# Altium PCB stm32pcb.PcbDoc
Units mm, origin at the board's own origin, x right, y up, seen from the top; angles counter-clockwise.
Board outline 35.25 x 39.25 mm, 4 copper layers (L1 (Signal), L2 (GND), L3 (GND), L4 (Signal)), stack 1.57 mm thick; 34 components, 26 nets, 172 pads, 56 vias.
Unrouted connection lines stored in the file: 1.
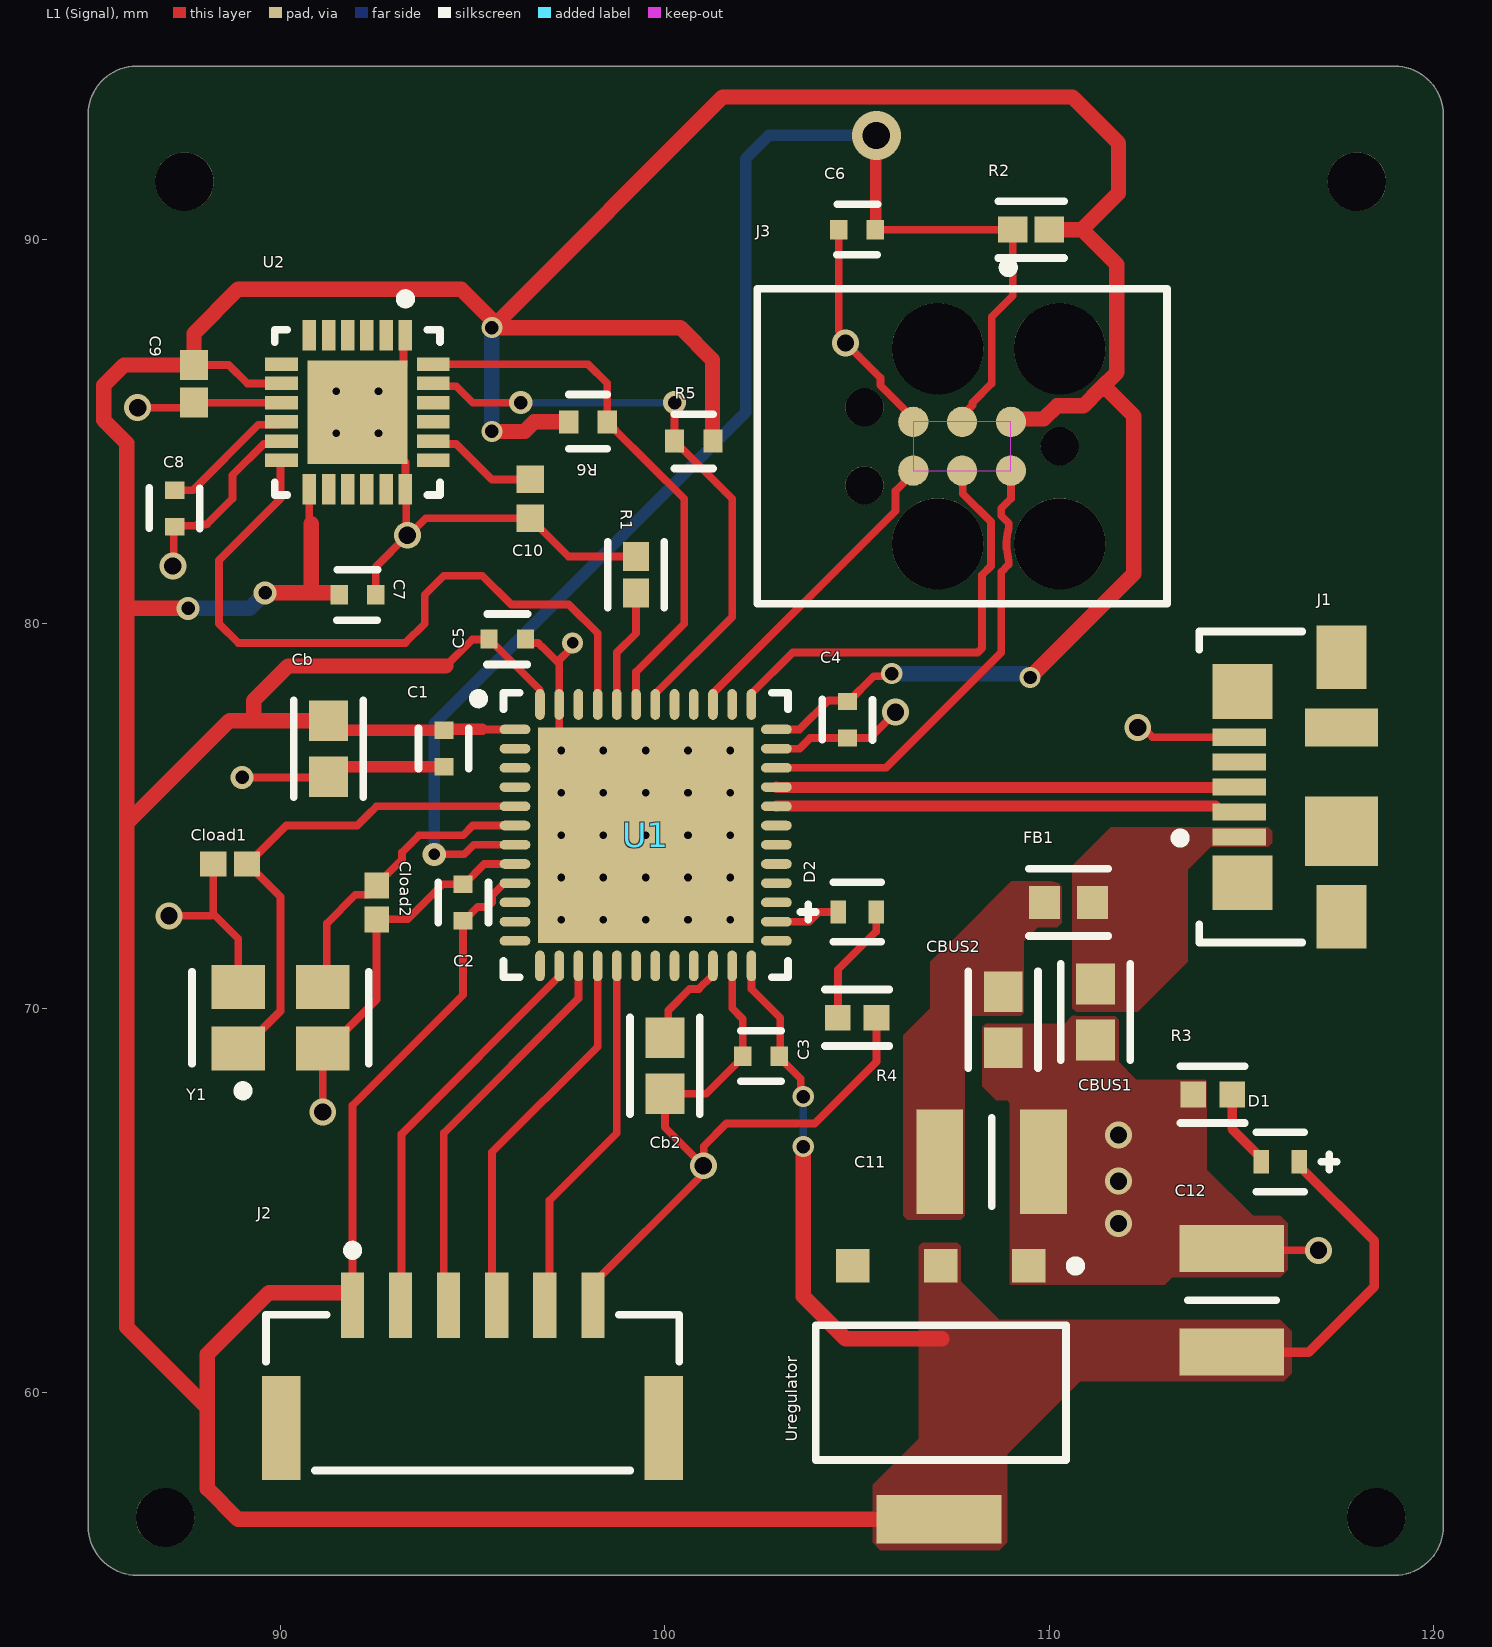
[diagram p0: L1 (Signal) view]
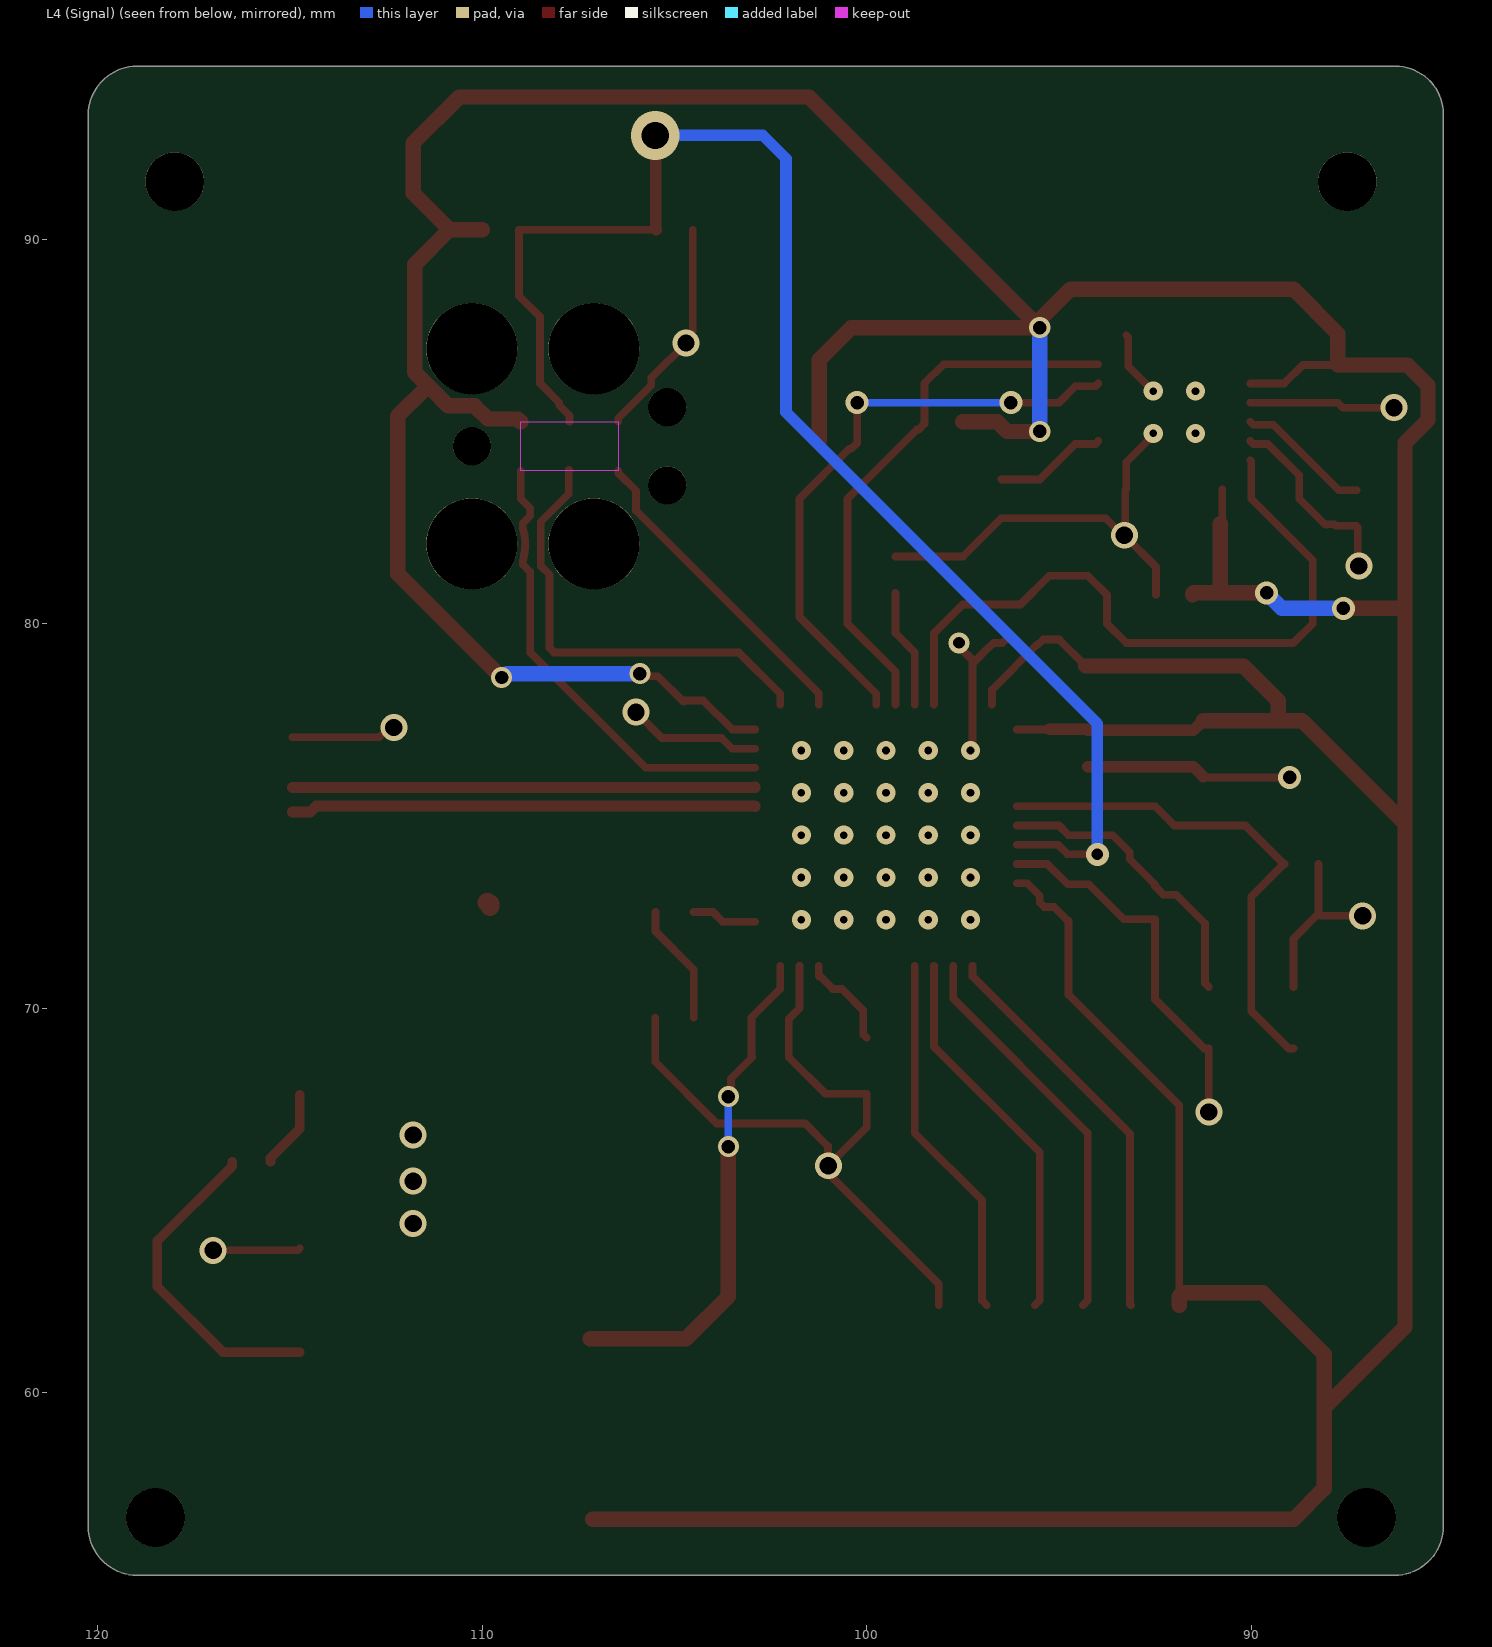
[diagram p1: L4 (Signal) view, seen from below]
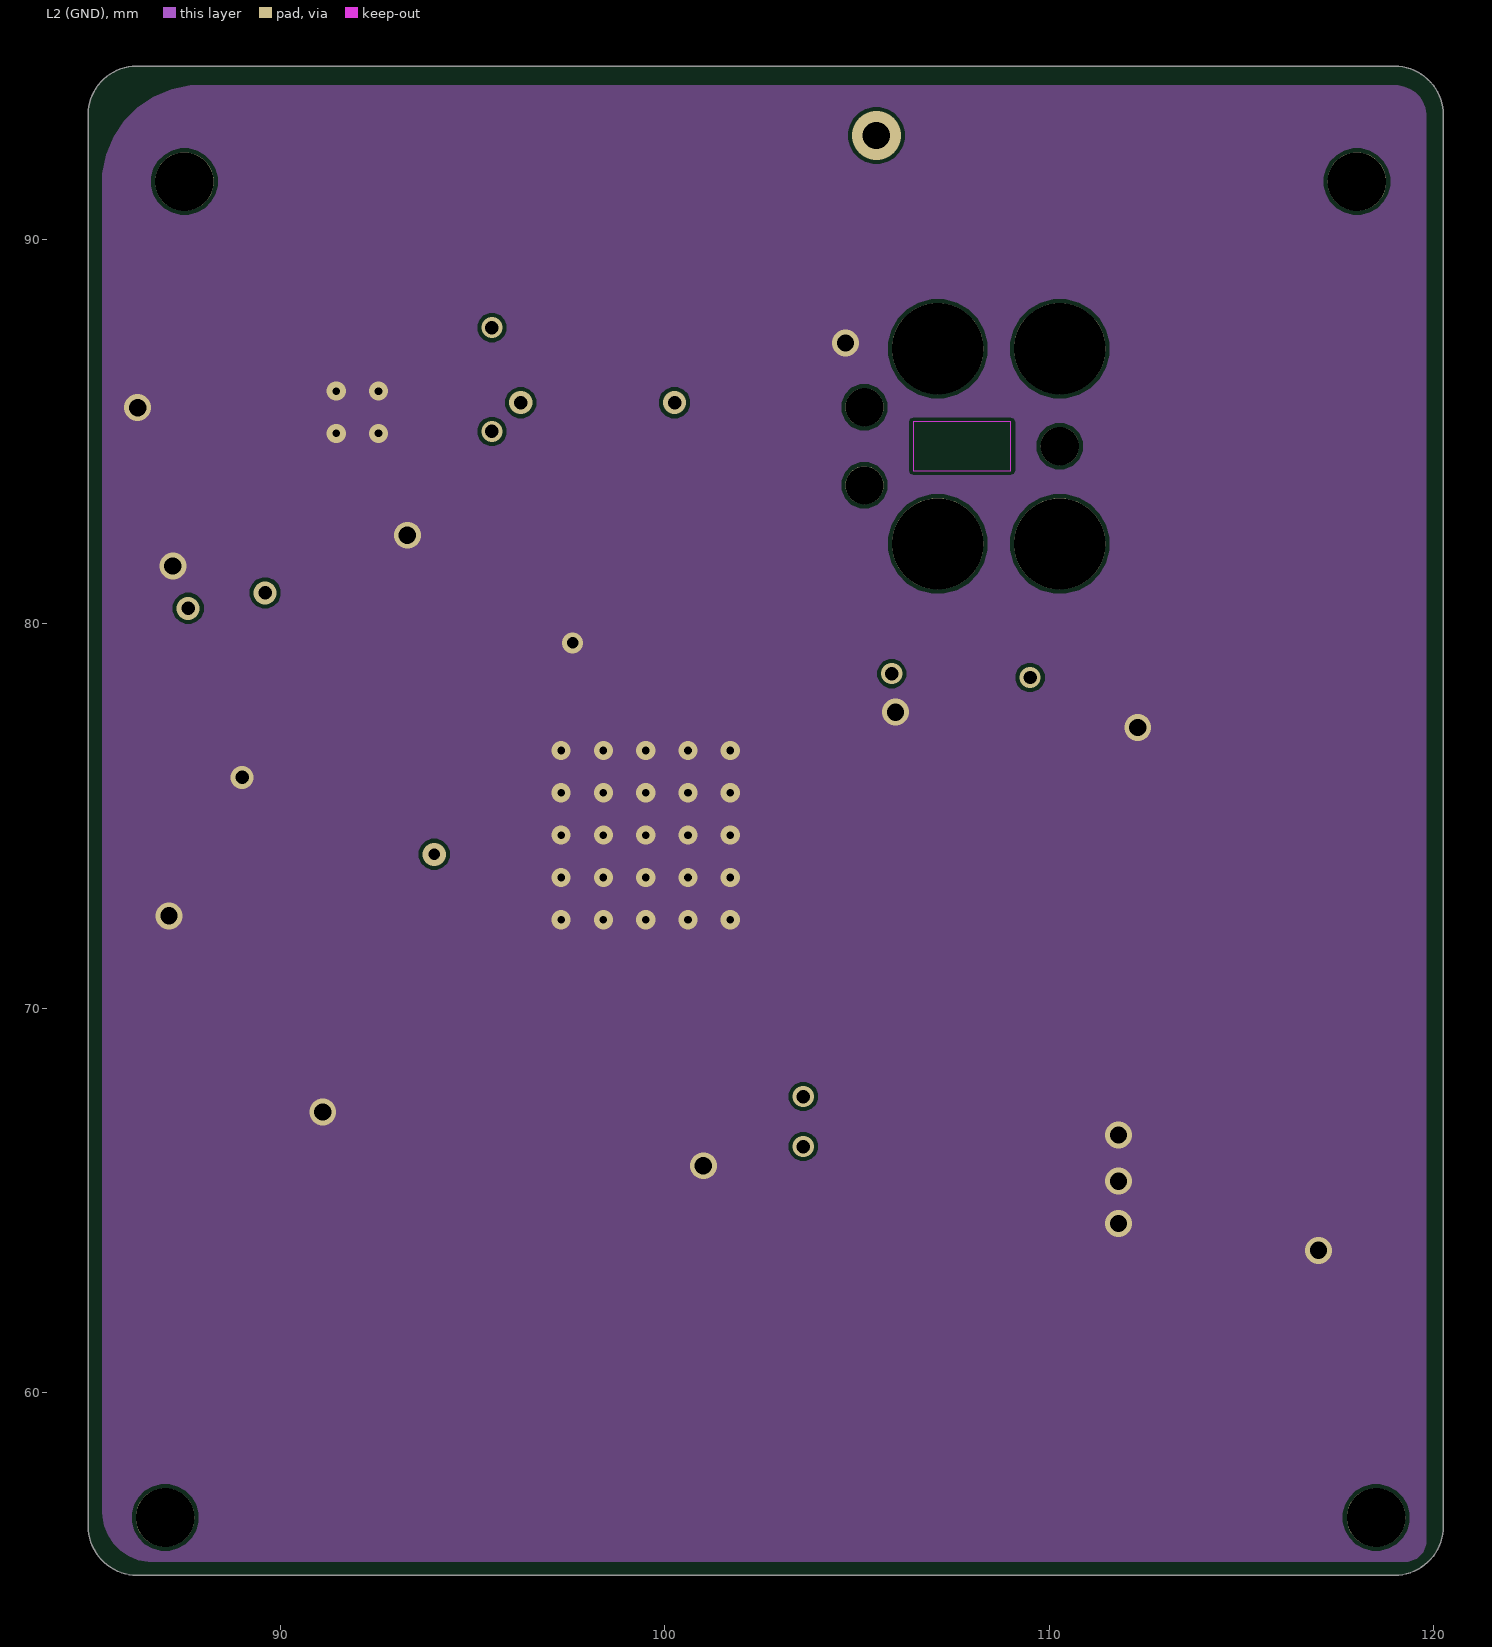
[diagram p2: L2 (GND)]
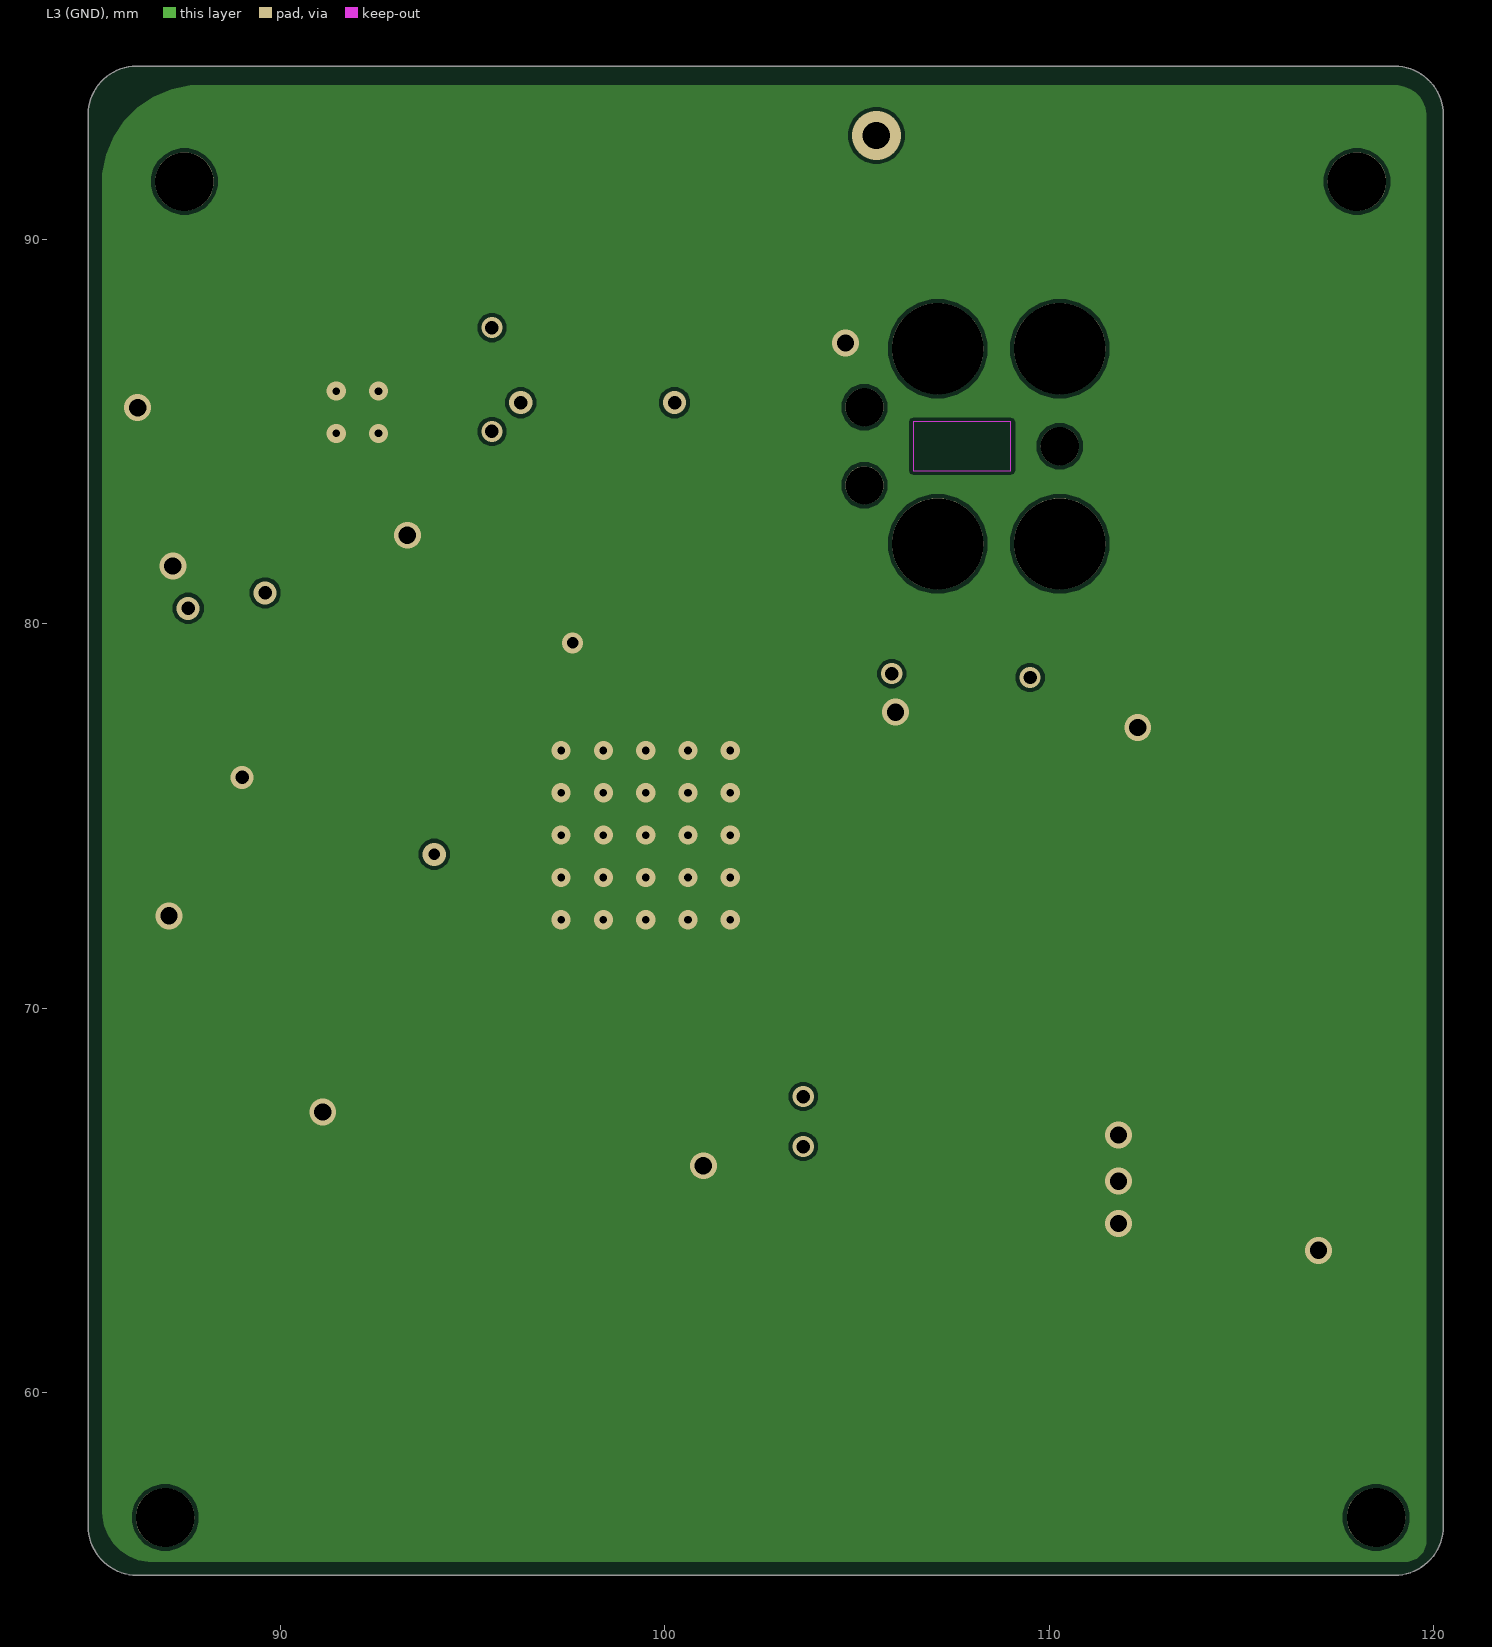
[diagram p3: L3 (GND)]
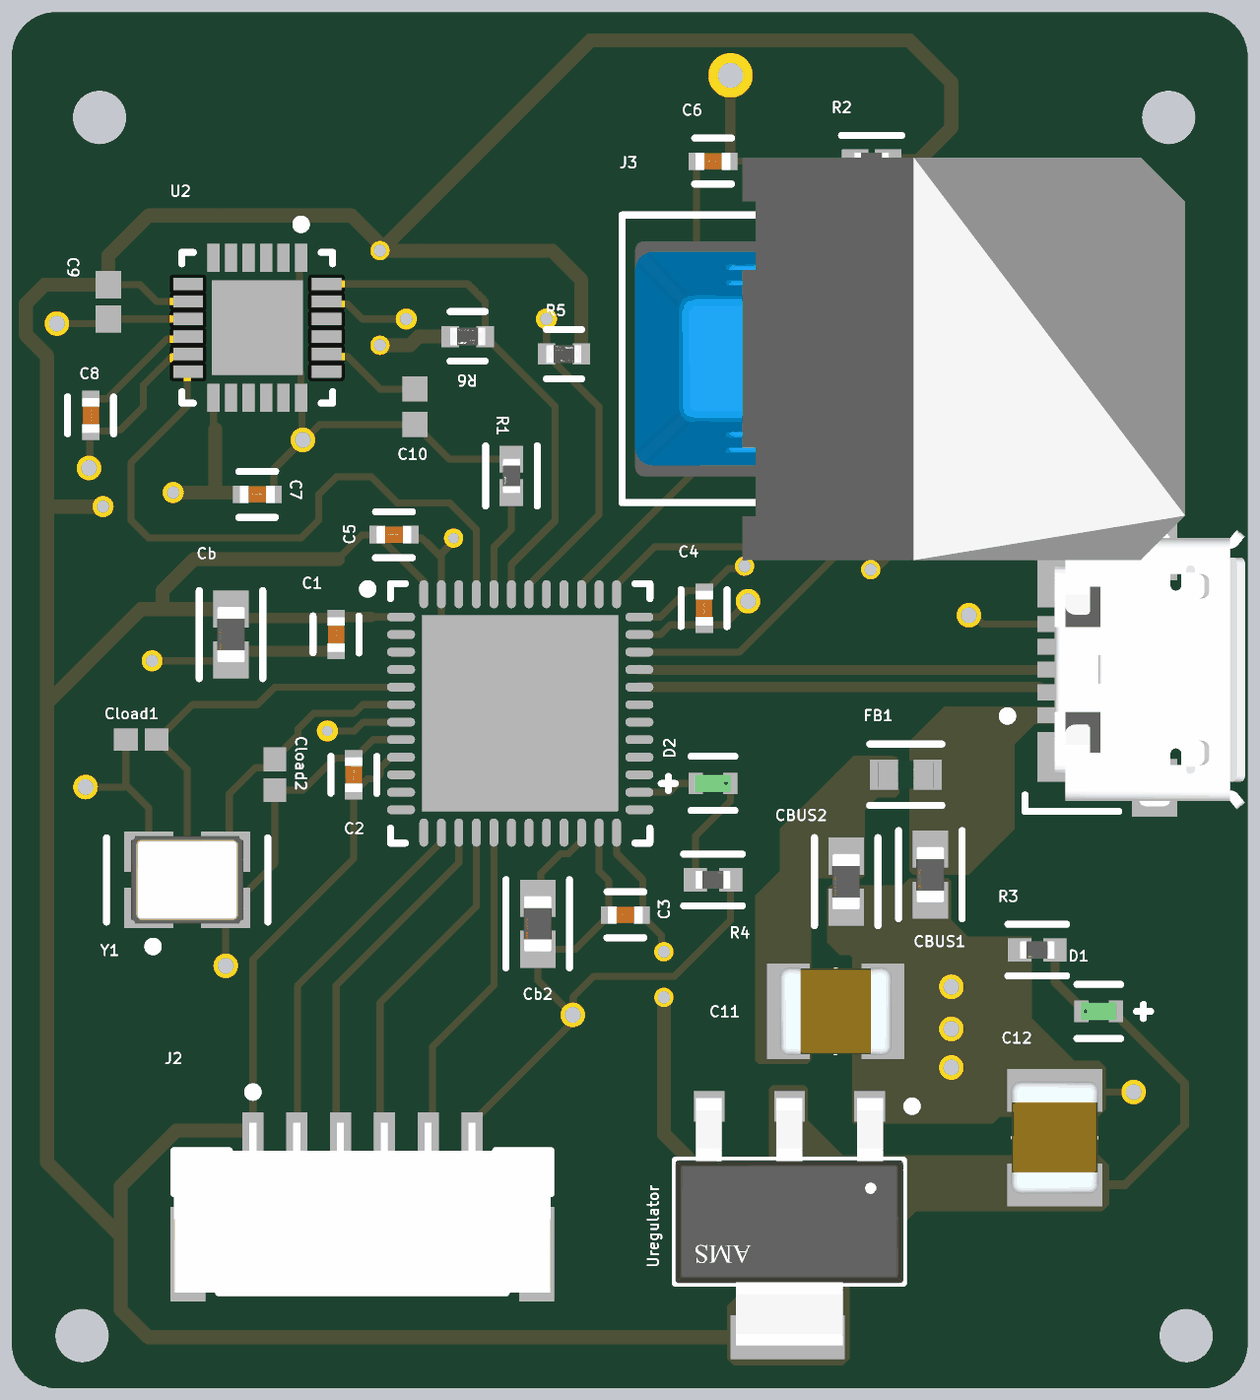
[diagram p4: 3D render of the assembled board from above, using the file's embedded part models]

## Layer stack, top to bottom
Top Solder: solder mask 0.0254, SM-001, Dk 4
L1 (Signal): signal copper 0.035
Dielectric 1: prepreg 0.2, PP-017, Dk 4.6
L2 (GND): signal copper 0.0175
Dielectric 3: core 1.065, Core-039, Dk 4.6
L3 (GND): signal copper 0.0175
Dielectric 5: prepreg 0.2, PP-017, Dk 4.6
L4 (Signal): signal copper 0.035
Bottom Solder: solder mask 0.0254, SM-001, Dk 4

## Board outline
85,56.52 85,93.25 cw(c86.25,93.25) 86.25,94.5 118.98,94.5 cw(c118.98,93.23) 120.25,93.23 120.25,56.52 cw(c118.98,56.52) 118.98,55.25 86.27,55.25 cw(c86.27,56.52)

## Design rules (kind name [scope] priority, off if disabled: settings)
Clearance [All] p1: gap=0.1 ignorepadtopadclearanceinfootprint=FALSE
DiffPairsRouting [All] p1: maxlimit=0.254 minlimit=0.203 mostfreqgap=0.254 toplayer_maxgap=0.203 toplayer_prefgap=0.203 toplayer_minwidth=0.285 toplayer_maxwidth=0.285 toplayer_prefwidth=0.285 bottomlayer_maxgap=0.203 bottomlayer_prefgap=0.203 bottomlayer_minwidth=0.285 bottomlayer_maxwidth=0.285 bottomlayer_prefwidth=0.285 impedanceprofiledriven=TRUE impedanceprofileid={B89FA8B1-6A6C-4102-8C82-A7481BB1D34D} impedanceprofilevalue=90.000000 maxuncoupledlength=12.7
PolygonConnect [All] p1: connectstyle=Direct reliefconductorwidth=0.254 reliefentries=4 polygonreliefangle="90 Angle" airgapwidth=0.254
RoutingVias [All] p1: holewidth=0.3 width=0.7 viastyle="Through Hole" minholewidth=0.25 minwidth=0.55 maxholewidth=0.4 maxwidth=0.7
SolderMaskExpansion [All] p1: expansion=0 istentingtop=FALSE
SupplyNets "Schematic Supply Nets_4" [InNet('GND')] p1: voltage=0.000
SupplyNets "Schematic Supply Nets_3" [InNet('+5')] p2: voltage=0.000
SupplyNets "Schematic Supply Nets_1" [InNet('+3V3')] p3: voltage=0.000
SupplyNets "Schematic Supply Nets" [InNet('VBUS')] p4: voltage=0.000
UnRoutedNet [All] p1: checkbadconnections=TRUE
Width [All] p1: maxlimit=1 minlimit=0.2 preferedwidth=0.3 midlayer1_maxwidth=0.254 midlayer1_prefwidth=0.254 midlayer2_maxwidth=0.254 midlayer2_prefwidth=0.254 minimp=50.000000 maximp=50.000000 favimp=50.000000
28 further rules are at their usual default settings.

## Classes and differential pairs
differential pair class DIFF_USB: USB_D
differential pair USB_D: +USB_D_P -USB_D_N

## Components (designator, comment, footprint, x,y, rotation, side; value= is the part's Value field where it differs from the comment)
C1 "100n" FP-0402-L_1_0_0_05-W_0_5-MFG 94.25,76.75 r270 top
C2 "100n" FP-0402-L_1_0_0_05-W_0_5-MFG 94.75,72.75 r90 top
C3 "100n" FP-0402-L_1_0_0_05-W_0_5-MFG 102.5,68.75 r180 top
C4 "100n" FP-0402-L_1_0_0_05-W_0_5-MFG 104.75,77.5 r270 top
C5 "100n" FP-0402-L_1_0_0_05-W_0_5-MFG 95.9,79.6 r0 top
C6 "100n" FP-0402-L_1_0_0_05-W_0_5-MFG 105,90.25 r180 top
C7 "100n" FP-0402-L_1_0_0_05-W_0_5-MFG 92,80.75 r0 top
C8 "100n" FP-0402-L_1_0_0_05-W_0_5-MFG 87.25,83 r270 top
C9 "10n" CAPC1005X56X25ML10T15 87.75,86.24 r90 top
C10 "2n2" CAPC1005X55X25ML05T05 96.5,83.25 r90 top
C11 "22u" CAPC3225X270N 108.5,66 r180 top
C12 "22u" CAPC3225X270N 114.75,62.4 r270 top
Cb "2.2u" FP-0603-L_1_6_0_2-W_0_8_0-IPC_B 91.25,76.75 r270 top
Cb2 "2u2" FP-0603-L_1_6_0_2-W_0_8_0-IPC_B 100,68.5 r270 top
CBUS1 "2.2u" FP-0603-L_1_6_0_2-W_0_8_0-IPC_B 111.2,69.9 r270 top
CBUS2 "2.2u" FP-0603-L_1_6_0_2-W_0_8_0-IPC_B 108.8,69.7 r270 top
Cload1 "10pF" CAPC1005X56X25NL10T15 88.69,73.75 r0 top
Cload2 "10pF" CAPC1005X56X25NL10T15 92.5,72.75 r90 top
D1 "Green" FP-SM0402GC-MFG 116.005,66 r180 top
D2 "Green" FP-SM0402GC-MFG 105,72.5 r0 top
FB1 "MPZ1608S101ATAH0" FP-MPZ1608-0_6-IPC_C 110.5,72.75 r180 top
J1 "473460001" FP-473460001-MFG 117.25,75.75 r90 top
J2 "SM06B-GHS-TB(LF)(SN)" FP-SM06B-GHS-TB_LF_SN-MFG 95,60 r0 top
J3 "DNP" Tag-Connect_0_0 107.73,84.615 r180 top
R1 "10k" FP-AT0402-IPC_A 99.25,81.274 r270 top
R2 "10k" FP-AT0402-IPC_A 109.524,90.25 r0 top
R3 "1k" FP-TFCR0402-IPC_A 114.25,67.75 r180 top
R4 "1k" FP-TFCR0402-IPC_A 105,69.75 r0 top
R5 "2.2k" FP-RT0402-MFG 100.75,84.75 r0 top value=2.2KΩ
R6 "2.2k" FP-RT0402-MFG 98,85.25 r180 top value=2.2KΩ
U1 "STM32F411CEU6" STM-UFQFPN48_L 99.5,74.5 r0 top
U2 "MPU-6050" IS-QFN-24_V 92,85.5 r270 top
Uregulator "AMS1117-3.3" FP-AMS1117-IPC_C 107.179,60 r270 top
Y1 "25MHz" FP-TSX-3225-MFG 90,69.75 r0 top

## Footprints (in the part's own frame and the unit in brackets; to place one, negate y for a bottom-side part, rotate by r counter-clockwise, add the part's x,y. Pads: shape width x height; smd on the part's side, far side on the other; paste and mask are expansions set on the pad)
CAPC1005X55X25ML05T05 [mm] "Chip Capacitor, 2-Leads, Body 1.00x0.50mm, IPC Low Density"
  rect 0.72x0.72 smd: 1(-0.51,0) 2(0.51,0)
  body extent -0.53,-0.28 0.53,0.27, height 0.55
CAPC1005X56X25ML10T15 [mm] "Chip Capacitor, 2-Leads, Body 1.00x0.50mm, IPC Low Density"
  rect 0.78x0.74 smd: 1(-0.49,0) 2(0.49,0)
  body extent -0.55,-0.3 0.55,0.3, height 0.56
CAPC1005X56X25NL10T15 [mm] "Chip Capacitor, 2-Leads, Body 1.00x0.50mm, IPC Medium Density"
  rect 0.68x0.64 smd: 1(-0.44,0) 2(0.44,0)
  body extent -0.55,-0.3 0.55,0.3, height 0.56
CAPC3225X270N [mm]
  rect 1.22x2.72 smd: 1(-1.35,0) 2(1.35,0)
  silkscreen extent 0,-1.15 0,1.15, body extent -1.6,-1.25 1.6,1.25, height 2.7
FP-0402-L_1_0_0_05-W_0_5-MFG [mm]
  rect 0.45x0.5 smd paste+0 mask+0: 1(-0.475,0) 2(0.475,0)
  silkscreen extent -0.53,-0.66 0.53,0.65, body extent -0.8,-0.38 0.8,0.38, height 0.25
FP-0603-L_1_6_0_2-W_0_8_0-IPC_B [mm]
  rect 1.058x1.012 smd paste+0 mask+0: 1(-0.727,0) 2(0.727,0)
  silkscreen extent -1.26,-0.91 1.26,0.91, body extent -1.51,-0.76 1.51,0.76, height 0.25
FP-473460001-MFG [mm]
  rect 0.45x1.38 smd paste+0 mask+0: 1(-1.3,2.31) 2(-0.65,2.31) 3(0,2.31) 4(0.65,2.31) 5(1.3,2.31)
  rect 1.425x1.55 smd paste+0 mask+0: 6(-2.488,2.225) 7(2.488,2.225)
  rect 1.65x1.3 smd paste+0 mask+0: 8(-3.375,-0.35) 11(3.375,-0.35)
  rect 1.8x1.9 smd paste+0 mask+0: 9(-1.15,-0.35)
  rect 1x1.9 smd paste+0 mask+0: 10(1.55,-0.35)
  silkscreen extent -4.05,0.67 4.05,3.97, body extent -4.3,-2.48 4.3,3.45, height 0.25
FP-AMS1117-IPC_C [mm]
  rect 0.872x0.872 smd paste+0 mask+0: 1(-3.295,2.29) 2(-3.295,0) 3(-3.295,-2.29)
  rect 1.25x3.25 smd paste+0 mask+0: 4(3.296,-0.049)
  silkscreen extent -3.42,-3.25 1.75,3.63, body extent -3.9,-3.35 3.9,3.35, height 0.25
FP-AT0402-IPC_A [mm]
  rect 0.76x0.672 smd paste+0 mask+0: 1(-0.476,0) 2(0.476,0)
  silkscreen extent -0.86,-0.74 0.86,0.74, body extent -1.06,-0.54 1.06,0.54, height 0.25
FP-MPZ1608-0_6-IPC_C [mm]
  rect 0.806x0.858 smd paste+0 mask+0: 1(-0.626,0) 2(0.626,0)
  silkscreen extent -1.03,-0.87 1.03,0.87, body extent -1.13,-0.58 1.13,0.58, height 0.25
FP-RT0402-MFG [mm]
  rect 0.5x0.6 smd paste+0 mask+0: 1(-0.5,0) 2(0.5,0)
  silkscreen extent -0.5,-0.71 0.5,0.7, body extent -0.85,-0.4 0.85,0.4, height 0.25
FP-SM06B-GHS-TB_LF_SN-MFG [mm]
  rect 0.6x1.7 smd paste+0 mask+0: 1(-3.125,2.275) 2(-1.875,2.275) 3(-0.625,2.275) 4(0.625,2.275) 5(1.875,2.275) 6(3.125,2.275)
  rect 1x2.7 smd paste+0 mask+0: 7(-4.975,-0.925) 8(4.975,-0.925)
  silkscreen extent -5.38,-2.02 5.38,3.82, body extent -5.58,-2.37 5.58,3.22, height 0.25
FP-SM0402GC-MFG [mil]
  rect 16x24 smd paste+0 mask+0: 1(-19.5,0) 2(19.5,0)
  silkscreen extent -58,-30 25,31, body extent -31,-18 31,18, height 10
FP-TFCR0402-IPC_A [mm]
  rect 0.665x0.672 smd paste+0 mask+0: 1(-0.504,0) 2(0.504,0)
  silkscreen extent -0.84,-0.74 0.84,0.74, body extent -1.04,-0.54 1.04,0.54, height 0.25
FP-TSX-3225-MFG [mm]
  rect 1.4x1.15 smd paste+0 mask+0: 1(-1.1,-0.8) 2(1.1,-0.8) 3(1.1,0.8) 4(-1.1,0.8)
  silkscreen extent -2.3,-2.02 2.3,1.2, body extent -1.9,-1.48 1.9,1.48, height 0.25
IS-QFN-24_V [mm] "QFN, 24-Leads, Body 4x4mm, Pitch 0.5mm, Thermal Pad 2.7x2.6mm"
  rect 0.8x0.35 smd: 1(-2,1.25) 2(-2,0.75) 3(-2,0.25) 4(-2,-0.25) 5(-2,-0.75) 6(-2,-1.25) 13(2,-1.25) 14(2,-0.75) 15(2,-0.25) 16(2,0.25) 17(2,0.75) 18(2,1.25)
  rect 0.35x0.85 smd mask+0.102: 7(-1.25,-1.975) 8(-0.75,-1.975) 9(-0.25,-1.975) 10(0.25,-1.975) 11(0.75,-1.975) 12(1.25,-1.975) 19(1.25,1.975) 20(0.75,1.975) 21(0.25,1.975) 22(-0.25,1.975) 23(-0.75,1.975) 24(-1.25,1.975)
  rect 2.7x2.6 smd: 25(0,0)
  silkscreen extent -3.07,-2.15 2.15,2.15, body extent -2,-2 2,2, height 0.95
STM-UFQFPN48_L [mm] "QFN, 48-Leads, Body 7.1x7.1mm, Pitch 0.5mm, Thermal Pad 5.6x5.6mm, IPC High Density"
  oval 0.8x0.25 smd: 1(-3.4,2.75) 2(-3.4,2.25) 3(-3.4,1.75) 4(-3.4,1.25) 5(-3.4,0.75) 6(-3.4,0.25) 7(-3.4,-0.25) 8(-3.4,-0.75) 9(-3.4,-1.25) 10(-3.4,-1.75) 11(-3.4,-2.25) 12(-3.4,-2.75) 25(3.4,-2.75) 26(3.4,-2.25) 27(3.4,-1.75) 28(3.4,-1.25) 29(3.4,-0.75) 30(3.4,-0.25) 31(3.4,0.25) 32(3.4,0.75) 33(3.4,1.25) 34(3.4,1.75) 35(3.4,2.25) 36(3.4,2.75)
  oval 0.25x0.8 smd: 13(-2.75,-3.4) 14(-2.25,-3.4) 15(-1.75,-3.4) 16(-1.25,-3.4) 17(-0.75,-3.4) 18(-0.25,-3.4) 19(0.25,-3.4) 20(0.75,-3.4) 21(1.25,-3.4) 22(1.75,-3.4) 23(2.25,-3.4) 24(2.75,-3.4) 37(2.75,3.4) 38(2.25,3.4) 39(1.75,3.4) 40(1.25,3.4) 41(0.75,3.4) 42(0.25,3.4) 43(-0.25,3.4) 44(-0.75,3.4) 45(-1.25,3.4) 46(-1.75,3.4) 47(-2.25,3.4) 48(-2.75,3.4)
  rect 5.6x5.6 smd: 49(0,0)
  silkscreen extent -4.47,-3.7 3.7,3.7, body extent -3.55,-3.55 3.55,3.55, height 0.6
Tag-Connect_0_0 [mm]
  round 0.787 smd paste-1000 mask+0: 1(-1.27,-0.635) 2(-1.27,0.635) 3(0,-0.635) 4(0,0.635) 5(1.27,-0.635) 6(1.27,0.635)
  round 2.375 hole 2.375 unplated paste-2539.97 mask+0: ""(-2.54,2.54) ""(-2.54,-2.54) ""(0.635,2.54) ""(0.635,-2.54)
  round 0.991 hole 0.991 unplated paste-2539.97 mask+0: ""(-2.54,0) ""(2.54,-1.016) ""(2.54,1.016)
  Keep-Out Layer region: -1.27,-0.635 1.27,-0.635 1.27,0.635 -1.27,0.635
  silkscreen extent -5.33,-4.77 5.33,4.1, body extent -5.05,-3.91 5.05,3.91, height 0.25

## Part data
C1 C2 C3 C4 C5 C6 C7 C8: library part CMP-14477-001971-2, "None"
C9: library part CMP-2008-02553-1, Manufacturer="AVX Interconnect / Elco", Part Number=04023G103ZAT2A
C10: library part CMP-2008-01291-1, Manufacturer=Vitramon, Part Number=VJ0402Y222JXQPW1BC
C11 C12: library part CL32A226KOJNNNE, "Capacitor", Manufacturer_Name=SAMSUNG, Datasheet Link=https://ad.componentsearchengine.com/Datasheets/2/CL32A226KOJNNNE.pdf, Height=2.7mm, Manufacturer_Part_Number=CL32A226KOJNNNE
Cb Cb2 CBUS1 CBUS2: library part CMP-14477-003150-2, "None", Capacitance=2.2uF, Case/Package=0603, Max Operating Temperature=85°C, Min Operating Temperature=-55°C, Tolerance=20%, Voltage Rating=16V, Mount="Surface Mount", Packaging="Cut Tape", RoHS Compliant=Yes
Cload1 Cload2: library part CMP-2008-02993-1, Manufacturer="AVX Interconnect / Elco", Part Number=LD025A100JAB2A
D1 D2: library part CMP-35283-000001-2, "LED GREEN CLEAR 0402 SMD", Case Code (Imperial)=0402, Case Code (Metric)=1005, Forward Voltage=1.9V, Lens Color=Colorless, Test Current=20mA, Case/Package=0402, Color=Green, Dominant Wavelength=572nm, Height=0.71mm, Length=1mm, Lens Size=1mm, Lens Style=Flat, Lens Transparency=Clear, Luminous Intensity=28.5mcd, Mount="Surface Mount", Packaging="Tape and Reel", Viewing Angle=130°, Width=0.5mm
FB1: library part CMP-08257-000005-2, "FERRITE BEAD 100 OHM 0603 1LN", Case Code (Imperial)=0603, Case Code (Metric)=1608, Current Rating=3A, DC Resistance (DCR)=30mR, Package Quantity=4000, Tolerance=25%, Case/Package=0603, Core Material=Ferrite, Depth=0.8mm, Height=0.03inch, Impedance=100R, Length=0.063inch, Max DC Current=3A, Mount="Surface Mount", Packaging="Tape and Reel", REACH SVHC="No SVHC", RoHS Compliant=Yes, Width=0.031inch
J1: library part CMP-2000-05246-2, "CONN RCPT USB2.0 MICRO B SMD R/A", Current Rating=1.8A, Manufacturer=Molex, Package=0, Temperature="-30°C to +85°C", Temperature Range High=+85°C, Temperature Range Low=-30°C, Voltage Rating=30V, Automotive=No, Category=Conn, ComponentLink2Description=Datasheet, ComponentLink2URL=https://www.molex.com/webdocs/datasheets/pdf/en-us/0473460001_IO_CONNECTORS.pdf, Conn Orientation="Right Angle", Contact Material=Gold,Nickel, Device Class L1=Connectors, Device Class L2="USB Connectors", Device Class L3=unset, Digikey Description="CONN RCPT USB2.0 MICRO B SMD R/A", Footprint Url=https://www.molex.com/pdm_docs/sd/473460001_sd.pdf, Height=2.945mm, Is Female=yes, Lead Free=Yes, Manufacturer Part Number=473460001, Number Of Contacts=5, Octopart=https://octopart.com/47346-0001-molex-7164928, Pitch=0.65mm, RoHS=TRUE, Shielding=true, Usb Standard="USB 2.0"
J2: library part CMP-17439-000061-1, "CONN HEADER SMD R/A 6POS 1.25MM", Color=Natural, Contact Resistance=50mR, Current Rating=1A, Housing Color=Beige, Max Operating Temperature=85°C, Max Voltage Rating (AC)=50V, Min Operating Temperature=-25°C, Connector Type="Outer Shroud Contact", Contact Material=Bronze, Contact Plating=Tin, Depth=4.05mm, Fastening Type=Ramp, Housing Material=Polyamide, Lead Free="Lead Free", Length=10.75mm, Max Current Rating=1A, Mount="Surface Mount", Number Of Contacts=6, Number of Positions=6, Number of Rows=1, Orientation="Right Angle", Packaging="Tape and Reel", Pitch=1.25mm, Termination=Solder, Voltage Rating=50V
J3: library part CMP-009-000000-1, "TC2030-IDC 6PIN PLUG-OF-NAILS(TM) CABLE", Digikey Part Number=TC2030-IDC-ND, Manufacturer=Tag-Connect, Package=0, Part Number=TC2030-IDC, Temperature=to, Automotive=No, ComponentLink1Description=Upverter, ComponentLink1URL=https://upverter.com/part/id/6747dcd82e6d2f2a/, ComponentLink2Description=Datasheet, ComponentLink2URL=http://www.tag-connect.com/Materials/TC2030-IDC.pdf, Conn Orientation=Vertical, Datasheet Path=datasheets/Conn_Tag-Connect_TC2030-IDC_eec.pdf, Digikey Description="CABLE ADAPTER 6 POS", helpURL=https://upverter.com/part/id/6747dcd82e6d2f2a/, Is Female=yes, Lead Free=Yes, Number Of Contacts=6, Pitch=1.27mm, RoHS=TRUE, Symbol Hash=340f86754993f25901839ab6d466df7bc733a4379ebf4916fc091c10d5bb8907, Verification Version=0.0.0.3
R1 R2: library part CMP-03412-043449-1, "Thin Film Chip Resistors Automotive Grade 10kΩ 0.5% 25ppm/°C 0402", Case Code (Imperial)=0402, Case Code (Metric)=1005, Max Operating Temperature=155°C, Max Power Dissipation=63mW, Min Operating Temperature=-55°C, Ratings=AEC-Q200, Resistance=10kR, Resistor Type="Thin Film", Temperature Coefficient=25ppm/°C, Tolerance=0.5%, Case/Package=0402, Features="Moisture Resistant", Height=0.014inch, Length=0.039inch, Number of Terminations=2, Packaging="Cut Tape", RoHS Compliant=Yes, Series=AT, Width=0.02inch
R3 R4: library part CMP-250906-247784-1, "RES Thin Film,  1kΩ, 0.5%, 0.063W, 25ppm/°C, 0402"
R5 R6: library part CMP-03412-019720-1, "RES SMD 2.2K OHM 0.1% 1/16W 0402", Manufacturer=Yageo, Manufacturer Part Number=RT0402BRE072K2L, Package=RT0402, Power Rating=0.063W, Resistance=2.2KΩ, Temperature="-55°C to +155°C", Temperature Coefficient="50 ppm/°C", Temperature Range High=+155°C, Temperature Range Low=-55°C, Tolerance=0.001, Voltage Rating=50V, Automotive=No, Category=Res, ComponentLink2Description=Datasheet, ComponentLink2URL=http://www.yageo.com/documents/recent/PYu-RT_1-to-0.01_RoHS_L_9.pdf, Composition="Thin Film", Device Class L1="Passive Components", Device Class L2=Resistors, Device Class L3="Chip SMD Resistors", Digikey Description="RES SMD 2.2K OHM 0.1% 1/16W 0402", Footprint Url=http://www.yageo.com/exep/pages/download/literatures/PYu-R_Mount_10.pdf, Height=0.35mm, Ipc Land Pattern Name=RESC10050X30, Lead Free=Yes, Octopart=https://octopart.com/rt0402bre072k2l-yageo-1445889, RoHS=TRUE, Series=RT
U1: library part CMP-0243-00165-1, "ARM Cortex-M4 32-bit MCU+FPU, 512 KB Flash, 128 KB RAM, 36 I/Os, 48-Pin UFQFPN, -40 to 85 degC, Tray", I/Os (High Current)=36, Operating Frequency(F) (Processor speed) (MHz)=100, Package Description=UFQFPN48, Package Reference="48-Pin Ultra Thin Fine Pitch Quad Flat No-Lead, 7 x 7 x 0.6 mm Body, 0.5 mm Pitch, Exposed Pad", Supply Voltage(Vcc) min (V)=1.7, ComponentLink1Description="Manufacturer URL", ComponentLink1URL=http://www.st.com/, ComponentLink2Description=Datasheet, ComponentLink2URL=http://www.st.com/st-web-ui/static/active/en/resource/technical/document/datasheet/DM00115249.pdf, Core="ARM Cortex-M4", DatasheetVersion="Rev. 6", FLASH Size (Prog) (kB)=512, Internal RAM Size (kB)=128, Mounting Technology="Surface Mount", Packing=Tray
U2: library part CMP-1753-00002-2, "3-Axis Gyroscope, Accelerometer and a Digital Motion Processor(TM) (DMP), 2.375 to 3.46 V, -40 to 85 degC, 24-Pin QFN, RoHS, Tape and Reel", Manufacturer=InvenSense, Standard Package=5,000, Category=Sensors,Transducers, Datasheet URL=http://datasheet.octopart.com/MPU-6050-InvenSense-datasheet-14421344.pdf, Datasheet Version="Rev. 3.3, 05/2012", Dynamic Catalog=MPU-6000™Series, Family=Multifunction, Featured Product=MPU-60506-Axis,IntegratedI²CSolution, Manufacturer URL=http://www.invensense.com/, Online Catalog=MPU-6000™Series, Other Names="1428-1007-2 / MPU6050", Output Type=Digital, Sensor Type=MotionTracking, Unit PriceUSD=Digital
Uregulator: library part CMP-209535-000001-1, "LDO Voltage Regulators 1A, 3.3V", Dropout Voltage=1.1V, Manufacturer="Advanced Monolithic Systems", Max Junction Temp=+125°C, Max Power Dissipation=1.2W, Max Supply Voltage=15V, Nominal Supply Current=5mA, Output Current=1A, Output Voltage=3.3V, Package=AMS1117, Temperature="-40°C to +125°C", Temperature Range Low=-40°C, Automotive=No, Category=IC, ComponentLink2Description=Datasheet, ComponentLink2URL=http://www.advanced-monolithic.com/pdf/ds1117.pdf, Device Class L1="Integrated Circuits (ICs)", Device Class L2="Power Management ICs", Device Class L3="Voltage Regulators - Linear", Height=1.8mm, Ipc Land Pattern Name=SOT229P700X180-4, Lead Free=Yes, Manufacturer Part Number=AMS1117-3.3, Number Of Outputs=1, Octopart=https://octopart.com/ams1117-3.3-advanced+monolithic+systems-25899300, Output Type=Fixed, RoHS=TRUE, Standoff Height=0.64mm, Temperature Range High=+125°C
Y1: library part CMP-36405-000018-1, "CRYSTAL 24.0000MHZ 9PF SMD", Case/Package=SMD/SMT, ESR (Equivalent Series Resistance)=40R, Frequency=24MHz, Frequency Stability=20ppm, Frequency Tolerance=10ppm, Load Capacitance=9pF, Max Operating Temperature=105°C, Min Operating Temperature=-40°C, Package Quantity=250, Depth=2.5mm, Drive Level=200uW, Height=0.024inch, Lead Free="Lead Free", Length=3.2mm, Mount="Surface Mount", Number of Pins=4, Packaging="Tape and Reel", RoHS Compliant=Yes, Series=TSX-3225, Termination=SMD/SMT, Tolerance=10ppm, Weight=0.000564oz, Width=2.5mm

## Free pads (board coordinates)
  round 1.524 hole 1.524 unplated: MH(87,56.75) MH(87.5,91.5) MH(118,91.5) MH(118.5,56.75)

## Via types
v1: diameter 0.5, hole 0.2, L1 (Signal) to L4 (Signal), 29 vias
v2: diameter 0.7, hole 0.45, L1 (Signal) to L4 (Signal), 13 vias
v3: diameter 0.55, hole 0.35, L1 (Signal) to L4 (Signal), 6 vias
v4: diameter 0.6, hole 0.35, L1 (Signal) to L4 (Signal), 5 vias
v5: diameter 0.55, hole 0.3, L1 (Signal) to L4 (Signal), 1 vias
v6: diameter 1.27, hole 0.711, L1 (Signal) to L4 (Signal), 1 vias
v7: diameter 0.6, hole 0.3, L1 (Signal) to L4 (Signal), 1 vias

## Nets (pads, with @x,y where several pads share a name; then routed paths per layer and width w, separated by ;. In a path a pad name is that pad's centre, name@x,y a point inside that pad or via, vN(x,y) a via of type N, cw(c..) or ccw(c..) an arc to the next point about the centre after c; other vN are vias at no path point)
+3V3: C1.1 C2.1 C3.1 C4.1 C5.1 C7.1 C9.2 C12.2 Cb.1 D1.1 J2.1 J3.1 R2.2 R5.2 R6.2 U1.1 U1.9 U1.24 U1.36 U1.48 U2.8 U2.13 Uregulator.2 Uregulator.4 | length 193.3
  L1 (Signal) w0.2: C9.2 88.658,86.73 89.138,86.25 U2.8 ; U2.13 90.75,82.65 90.8,82.6 ; J2.1 91.875,67.475 94.75,70.35 C2.1 ; 94.3,78.9 94.988,79.588 95.413,79.588 95.55,79.45 95.575,79.45 96.74,78.285 96.74,77.91 U1.48 ; C2.1@94.775,72.275 95.133,72.633 95.383,72.633 95.5,72.75 95.5,72.925 95.825,73.25 U1.9 ; 95.25,77.25 U1.1 ; U1.24 102.25,70.5 103,69.75 103,68.775 C3.1 102.975,68.725 103.533,68.167 103.533,67.767 v3(103.6,67.7) ; U1.36 103.5,77.25 104.25,78 104.725,78 C4.1 104.775,77.975 105.433,78.633 105.833,78.633 v3(105.9,78.7)
  L1 (Signal) w0.25: C12.2 116.75,61.05 118.456,62.756 118.456,63.943 116.5,65.898 D1.1
  L1 (Signal) w0.3: Cb.1 91.502,77.225 C1.1 94.275,77.25 95.25,77.25
  L1 (Signal) w0.4: v4(87.6,80.4) 86,80.4 ; v4(89.6,80.8) 90.8,80.8 ; 90.8,82.6 90.8,80.8 ; Cb.1 89.3,77.477 ; C7.1 91.525,80.775 91.5,80.8 91.475,80.8 90.8,80.8 ; J2.1 91.875,62.5 91.775,62.6 89.7,62.6 88.1,61 88.1,59.6 ; 94.3,78.9 90.2,78.9 89.3,78 89.3,77.477 ; v3(95.5,85) 96.35,85 96.6,85.25 R6.2 ; v3@95.6,87.8 101.5,93.7 110.6,93.7 111.8,92.5 111.8,91.85 111.8,91.2 110.85,90.25 ; R5.2 101.239,84.761 101.239,86.861 100.4,87.7 v3(95.5,87.7) 95.5,87.9 94.7,88.7 88.9,88.7 87.75,87.55 C9.2 85.93,86.73 85.4,86.2 85.4,85.3 86,84.7 86,80.4 ; v3(103.6,66.4) 103.6,62.5 104.7,61.4 107.2,61.4 ; Uregulator.4 88.896,56.704 88.1,57.5 88.1,59.6 ; J3.1 109.074,85.324 109.854,85.324 110.197,85.667 110.886,85.667 111.322,86.103 ; v3(109.5,78.6) 112.2,81.3 112.2,85.4 111.497,86.103 111.322,86.103 ; R2.2 110.85,90.25 ; 86,74.8 86,61.7 88.1,59.6 ; 86,74.8 86,80.4 ; 86,74.8 88.677,77.477 89.3,77.477 ; 110.85,90.25 111.758,89.342 111.758,86.539 111.322,86.103
  L4 (Signal) w0.2: v3(103.6,66.4) v3(103.6,67.7)
  L4 (Signal) w0.4: v4(87.6,80.4) 89.2,80.4 v4(89.6,80.8) ; v3(95.5,85) v3(95.5,87.7) ; v3(105.9,78.7) 109.359,78.7 109.459,78.6 v3(109.5,78.6)
+5: C11.2 CBUS2.1 FB1.2 Uregulator.3 | length 0.1
  L1 (Signal) w0.5: FB1.2@109.8,72.65 109.8,72.7 109.824,72.7 FB1.2
GND: C1.2 C2.2 C3.2 C4.2 C5.2 C6.2 C7.2 C8.2 C9.1 C10.1 C11.1 C12.1 Cb2.2 Cb.2 CBUS1.2 CBUS2.2 Cload1.1 Cload2.1 J1.5 J2.6 J3.5 R1.1 R3.2 R4.2 U1.8 U1.23 U1.35 U1.47 U1.49 U2.1 U2.9 U2.11 U2.18 U2.25 Uregulator.1 Y1.2 Y1.4 | length 79.3
  L1 (Signal) w0.2: v2(86.284,85.619) 87.619,85.619 C9.1 U2.9 ; v2(87.1,72.4) 88.2,72.4 88.25,72.45 ; v2(87.2,81.5) 87.225,81.525 87.225,82.5 C8.2 87.275,82.55 87.8,82.55 87.838,82.588 88.031,82.588 88.039,82.579 ; 88.039,82.588 88.087,82.588 88.75,83.25 88.75,83.858 89.567,84.675 89.95,84.675 U2.11 ; Cload1.1 88.25,72.45 ; Y1.4 88.9,71.8 88.25,72.45 ; v4(89,76) 91.227,76 Cb.2 ; v2(91.1,67.3) Y1.2 91.225,68.95 92.5,70.225 Cload2.1 93.31,72.31 94.225,73.225 C2.2 ; C7.2 92.475,81.475 v2(93.3,82.3) ; U2.25@92.525,84.925 93.25,84.2 U2.18 93.275,83.475 93.275,82.325 v2(93.3,82.3) ; v1(92.55,86.05) 93.2,86.7 93.2,87.45 U2.1 ; C2.2@94.775,73.225 95.3,73.75 U1.8 ; C5.2 96.475,79.5 96.7,79.5 96.8,79.4 96.808,79.4 97.25,78.958 ; v1(97.3,76.7) 97.25,76.75 U1.47 97.25,78.958 ; v5(97.6,79.5) 97.6,79.405 97.25,79.055 97.25,78.958 ; J2.6 98.125,62.825 100.904,65.604 100.904,65.804 v2(101,65.9) ; R1.1 97.49,81.75 C10.1 93.779,82.74 93.339,82.3 v2(93.3,82.3) ; U1.23 101.75,69.993 102.025,69.718 C3.2 102.025,68.725 101.073,67.773 Cb2.2 100,66.9 v2(101,65.9) ; U1.35 103.5,76.75 103.775,77.025 C4.2 105.325,77.025 v2(106,77.7) ; C6.2 104.525,87.61 104.7,87.435 v2(104.7,87.3) 105.605,86.395 105.605,86.199 106.46,85.345 J3.5 ; R4.2 105.504,68.604 103.9,67 101.6,67 101.01,66.41 101.01,65.91 v2(101,65.9) ; v2(112.3,77.3) 112.435,77.3 112.685,77.05 J1.5 ; C12.1 114.8,63.7 v2(117,63.7)
  L1 (Signal) w0.3: Cb.2 91.502,76.275 C1.2
  other v1: 97.3,72.3 98.4,72.3 99.5,72.3 100.6,72.3 101.7,72.3 97.3,73.4 98.4,73.4 99.5,73.4 100.6,73.4 101.7,73.4 97.3,74.5 98.4,74.5 99.5,74.5 100.6,74.5 101.7,74.5 97.3,75.6 98.4,75.6 99.5,75.6 100.6,75.6 101.7,75.6 98.4,76.7 99.5,76.7 100.6,76.7 101.7,76.7 91.45,84.95 92.55,84.95 91.45,86.05
  other v2: 111.8,64.4 111.8,65.5 111.8,66.7
IMU_CPOUT: C10.2 U2.20 | length 2.9
  L1 (Signal) w0.2: U2.20 94.05,84.675 94.575,84.675 95.5,83.75 96.49,83.75 C10.2
IMU_INT: U1.45 U2.12 | length 18.6
  L1 (Signal) w0.2: U2.12 90,84.225 90,83.25 88.4,81.65 88.4,80 88.9,79.5 93.25,79.5 93.75,80 93.75,80.75 94.25,81.25 95.25,81.25 96,80.5 97.5,80.5 98.25,79.75 U1.45
IMU_REGOUT: C8.1 U2.10 | length 3.5
  L1 (Signal) w0.2: C8.1 87.725,83.475 89.425,85.175 89.95,85.175 U2.10
IMU_SCL: R5.1 U1.42 U2.23 | length 15.8
  L1 (Signal) w0.2: U2.23 94.05,86.175 94.575,86.175 95,85.75 v4(96.25,85.75) ; U1.42 99.75,78.175 101.75,80.175 101.75,83.25 100.45,84.55 100.4,84.55 100.25,84.7 R5.1 v4(100.25,85.75)
  L4 (Signal) w0.2: v4(96.25,85.75) v4(100.25,85.75)
IMU_SDA: R6.1 U1.43 U2.24 | length 14.4
  L1 (Signal) w0.2: U2.24 98,86.75 98.5,86.25 R6.1 ; R6.1@98.5,85.2 98.65,85.05 98.7,85.05 99.6,84.15 100.5,83.25 100.5,80 99.25,78.75 U1.43
LED_POWER_K: D1.2 R3.1 | length 2.1
  L1 (Signal) w0.25: R3.1 114.754,66.857 115.509,66.102 D1.2
MCU_BOOT0: R1.2 U1.44 | length 3.1
  L1 (Signal) w0.2: U1.44 98.75,79.25 99.25,79.75 R1.2
MCU_LED_A: D2.1 U1.26 | length 1.7
  L1 (Signal) w0.2: U1.26 103.75,72.25 104,72.5 D2.1
MCU_LED_K: D2.2 R4.1 | length 3.2
  L1 (Signal) w0.2: R4.1 104.5,69.754 104.5,71 105.495,71.995 D2.2
MCU_NRST: C6.1 J3.3 R2.1 U1.7 | length 38.9
  L1 (Signal) w0.2: v7(94,74) 94.776,74 95.026,74.25 U1.7 ; C6.1 R2.1 109.048,88.531 108.5,87.983 108.5,86.25 108,85.75 108,85.679 107.73,85.409 J3.3
  L1 (Signal) w0.3: C6.1 105.488,90.262 105.488,92.688 v6(105.5,92.7)
  L4 (Signal) w0.3: v7(94,74) 94,77.4 102.1,85.5 102.1,92.1 102.7,92.7 v6(105.5,92.7)
MCU_OSC_IN: Cload1.2 U1.5 Y1.1 | length 13.3
  L1 (Signal) w0.2: Y1.1 89.025,68.95 90,69.925 90,72.9 Cload1.2@89.15,73.75 ; Cload1.2 Cload1.2@89.15,73.75 ; U1.5 92.5,75.25 92.25,75 92,74.75 90.15,74.75 Cload1.2@89.15,73.75
MCU_OSC_OUT: Cload2.2 U1.6 Y1.3 | length 7.8
  L1 (Signal) w0.2: Y1.3 91.2,70.65 91.2,72.2 91.95,72.95 92.28,72.95 92.5,73.17 Cload2.2 ; Cload2.2@92.5,73.21 93.162,73.872 93.162,74.058 93.605,74.5 94.75,74.5 95,74.75 U1.6
MCU_PA4: J2.2 U1.14 | length 10.5
  L1 (Signal) w0.2: J2.2 93.15,62.3 93.15,66.725 97.25,70.825 U1.14
MCU_PA5: J2.3 U1.15 | length 10.3
  L1 (Signal) w0.2: J2.3 94.25,62.4 94.25,66.75 97.75,70.25 U1.15
MCU_PA6: J2.4 U1.16 | length 10
  L1 (Signal) w0.2: J2.4 95.5,62.4 95.5,66.25 98.25,69 U1.16
MCU_PA7: J2.5 U1.17 | length 9.6
  L1 (Signal) w0.2: J2.5 97,62.4 97,65 98.75,66.75 U1.17
MCU_SWCLK: J3.4 U1.37 | length 11.8
  L1 (Signal) w0.2: U1.37 102.25,78.175 103.325,79.25 108.133,79.25 108.25,79.367 108.25,81.268 108.483,81.5 108.483,82.65 107.75,83.382 107.75,84 J3.4
MCU_SWDIO: J3.2 U1.34 | length 12.1
  L1 (Signal) w0.2: U1.34 105.75,76.25 108.75,79.25 108.75,81.344 108.948,81.541 108.948,81.624 ; 108.948,81.625 108.914,81.78 cw(c110.27,82.075) 108.948,82.496 108.948,82.526 108.948,82.609 108.889,82.667 108.75,82.806 108.75,83 109,83.25 J3.2
MCU_SWO: J3.6 U1.39 | length 8.2
  L1 (Signal) w0.2: U1.39 101.25,78.189 106,82.939 106,83.459 106.46,83.919 J3.6
MCU_VCAP1: Cb2.1 U1.22 | length 2.5
  L1 (Signal) w0.2: Cb2.1 100.089,69.316 100.089,69.939 100.65,70.5 100.885,70.5 101.2,70.815 101.227,70.815 101.25,70.839 U1.22
USB_D_N: J1.2 U1.32 | length 12.1
  L1 (Signal) w0.285: U1.32 102.906,75.256 114.319,75.256 114.475,75.1 J1.2
USB_D_P: J1.3 U1.33 | length 12
  L1 (Signal) w0.285: U1.33 102.906,75.744 J1.3@114.934,75.744
VBUS: CBUS1.1 FB1.1 J1.1
pads on no net: J1.4 J1.6 J1.7 J1.8 J1.9 J1.10 J1.11 J2.7 J2.8 J3. U1.2 U1.3 U1.4 U1.10 U1.11 U1.12 U1.13 U1.18 U1.19 U1.20 U1.21 U1.25 U1.27 U1.28 U1.29 U1.30 U1.31 U1.38 U1.40 U1.41 U1.46 U2.2 U2.3 U2.4 U2.5 U2.6 U2.7 U2.14 U2.15 U2.16 U2.17 U2.19 U2.21 U2.22

## Polygon pours and split planes (outlines as drawn)
+5 on L1 (Signal) "+5_L01_P008" (solid, pour order 8): 106.2,69.3 106.9,70 106.9,71.2 107.485,71.785 107.5,71.785 109.015,73.3 110.3,73.3 110.3,73.298 110.321,73.277 110.321,73.154 110.253,73.243 110.253,73.221 110.323,73.151 110.323,72.223 110.2,72.1 109.7,72.1 109.336,71.736 109.336,69.88 109.256,69.8 108,69.8 107.8,69.6 107.8,64.6 107.7,64.5 106.3,64.5 106.2,64.6
+3V3 on L1 (Signal) "+3V3_L01_P002" (solid, pour order 2): 106.6,63.8 106.6,58.8 105.4,57.6 105.4,56.1 105.6,55.9 108.7,55.9 108.9,56.1 108.9,58.4 110.8,60.3 116.1,60.3 116.3,60.5 116.3,61.6 116,61.9 108.7,61.9 107.7,62.9 107.7,63.8 107.6,63.9 106.7,63.9
GND on L1 (Signal) "GND_L01_P004" (solid, pour order 4): 115.3,64.6 114.1,65.8 114.1,68.1 114.097,68.1 114.056,68.14 112.26,68.14 111.8,68.6 111.8,69.7 111.7,69.8 111.696,69.796 110.596,69.796 110.4,69.6 108.346,69.6 108.253,69.507 108.253,67.963 108.616,67.6 108.9,67.6 108.975,67.525 108.975,62.825 109,62.8 113,62.8 113.2,63 116,63 116.2,63.2 116.2,64.4 116,64.6
VBUS on L1 (Signal) "VBUS_L01_P000" (solid, pour order 0): 115.7,74.7 111.6,74.7 110.6,73.7 110.6,70 110.7,69.9 112.3,69.9 113.6,71.2 113.6,73.6 114.2,74.2 115.7,74.2 115.8,74.3 115.8,74.6
GND on L2 (GND) "GND_L02_P005" (solid, pour order 5): 85.368,56.871 85.368,91.46 cw(c87.908,91.46) 87.908,94 119,94 cw(c119,93.191) 119.809,93.191 119.809,56.179 cw(c119.223,56.179) 119.223,55.593 86.691,55.593 cw(c86.691,56.919) 85.365,56.919
GND on L3 (GND) "GND_L03_P006" (solid, pour order 6): 85.368,56.871 85.368,91.46 cw(c87.908,91.46) 87.908,94 119,94 cw(c119,93.191) 119.809,93.191 119.809,56.179 cw(c119.223,56.179) 119.223,55.593 86.691,55.593 cw(c86.691,56.919) 85.365,56.919